# Altium PCB PCB1.PcbDoc
Units mm, origin at the board's own origin, x right, y up, seen from the top; angles counter-clockwise.
Board outline 60.26 x 38.23 mm, 2 copper layers (Top Layer, Bottom Layer); 12 components, 6 nets, 31 pads, 10 vias.
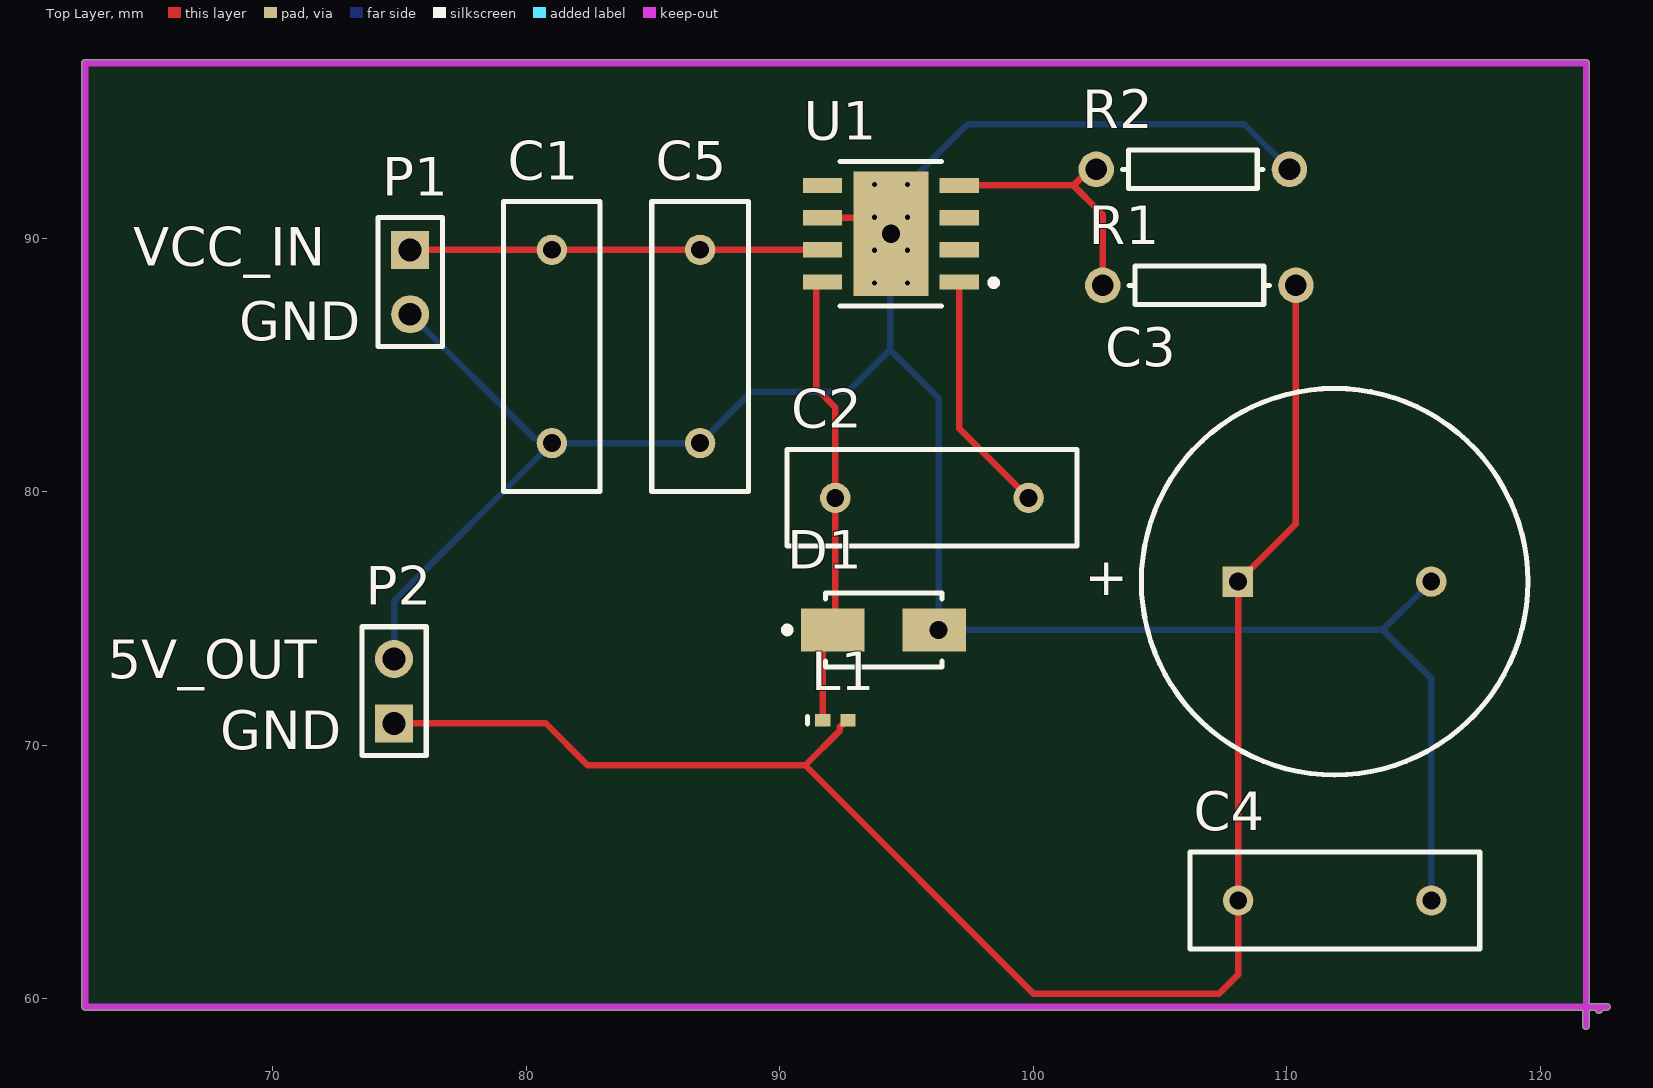
[diagram p0: Top Layer view]
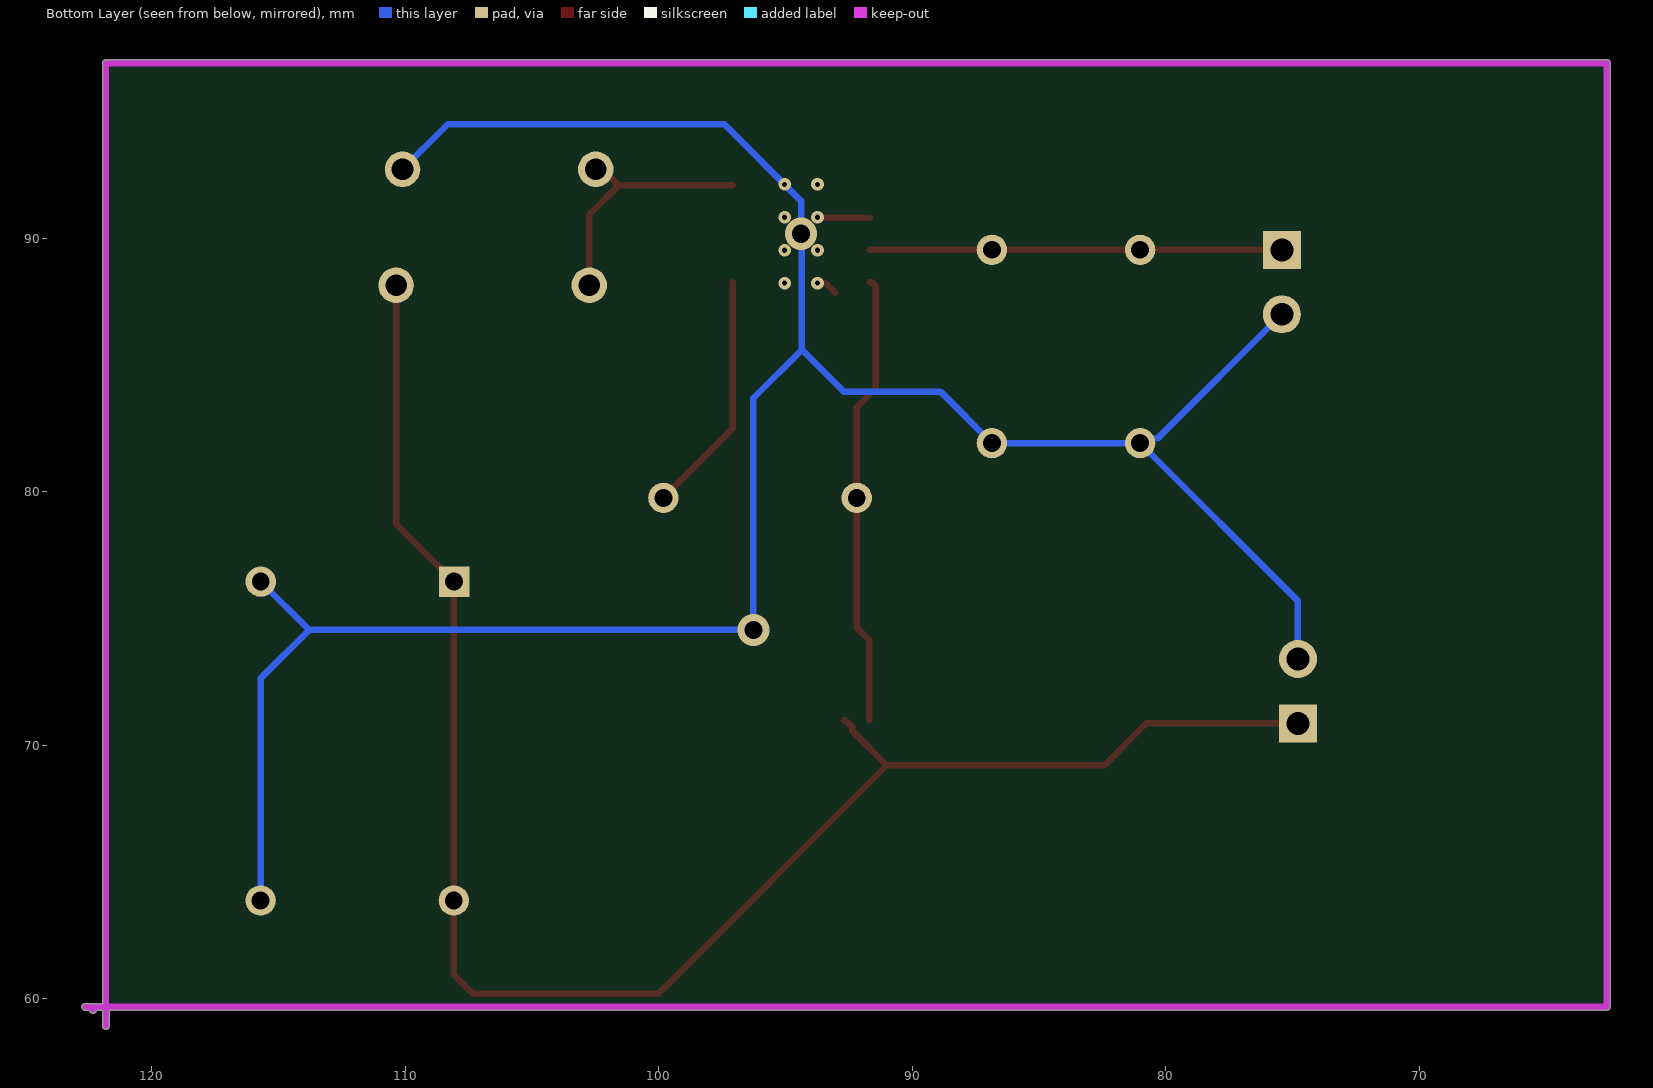
[diagram p1: Bottom Layer view, seen from below]

## Layer stack, top to bottom
Top Solder: solder mask 0.0102, Solder Resist, Dk 3.5
Top Layer: signal copper 0.0356
Dielectric 1: dielectric 0.32, FR-4, Dk 4.8
Bottom Layer: signal copper 0.0356
Bottom Solder: solder mask 0.0102, Solder Resist, Dk 3.5

## Board outline
121.666,58.928 121.666,59.563 62.611,59.563 cw(c62.611,59.69) 62.484,59.69 62.484,96.901 cw(c62.611,96.901) 62.611,97.028 121.793,97.028 cw(c121.793,96.901) 121.92,96.901 121.92,59.817 122.618,59.817 cw(c122.618,59.69) 122.746,59.69 cw(c122.618,59.69) 122.618,59.563 122.481,59.563 122.391,59.473 cw(c122.301,59.563) 122.174,59.563 121.92,59.563 121.92,58.928 cw(c121.793,58.928)

## Design rules (kind name [scope] priority, off if disabled: settings)
Clearance [All] p1: gap=0.254 ignorepadtopadclearanceinfootprint=FALSE except(0: Arc-Hole Track-Hole SMDPad-Hole THPad-Hole Via-Hole Fill-Hole Poly-Hole Region-Hole Text-Hole)
PolygonConnect [All] p1: connectstyle=Relief reliefconductorwidth=0.254 reliefentries=4 polygonreliefangle="90 Angle" airgapwidth=0.254
RoomDefinition Sheet1 [InComponentClass('Sheet1')] p1: confinementstyle=ConfineIn formatcopy=TRUE lockcomponents=FALSE outline 62.984,59.944 121.539,59.944 121.539,96.647 62.984,96.647
RoutingVias [All] p1: holewidth=0.711 width=1.27 viastyle="Through Hole" minholewidth=0.711 minwidth=1.27 maxholewidth=0.711 maxwidth=1.27
SolderMaskExpansion [All] p1: expansion=0.102 istentingtop=FALSE
Width [All] p1: maxlimit=0.254 minlimit=0.254 preferedwidth=0.254
30 further rules are at their usual default settings.

## Components (designator, comment, footprint, x,y, rotation, side; value= is the part's Value field where it differs from the comment)
C1 "Cap" RAD-0.3 81.018,85.725 r90 top value=4.7uF
C2 "Cap" RAD-0.3 96.004,79.756 r0 top value=10uF
C3 "Cap Pol1" RB7.6-15 111.879,76.454 r180 top value=100uF
C4 "Cap" RAD-0.3 111.887,63.881 r180 top value=100nF
C5 "Cap" RAD-0.3 86.86,85.725 r90 top value=4.7uF
D1 "B340A-13-F" FP-SMA-MFG 94.099,74.549 r0 top
L1 "Inductor" 0402-A 92.194,70.993 r0 top value=22uH
P1 "Header 2" HDR1X2 75.43,89.535 r270 top
P2 "Header 2" HDR1X2 74.795,70.866 r90 top
R1 "Res1" AXIAL-0.3 106.545,88.138 r0 top value=10K
R2 "Res1" AXIAL-0.3 106.291,92.71 r180 top value=3.3K
U1 "TPS5430DDA" FP-DDA0008J-MFG 94.386,90.17 r180 top

## Footprints (in the part's own frame and the unit in brackets; to place one, negate y for a bottom-side part, rotate by r counter-clockwise, add the part's x,y. Pads: shape width x height; smd on the part's side, far side on the other; paste and mask are expansions set on the pad)
0402-A [mm] "Chip Inductor, Body 1.0x0.5mm, IPC High Density"
  rect 0.6x0.5 smd: 1(-0.5,0) 2(0.5,0)
  silkscreen extent -1.1,-0.15 -1.1,0.15, body extent -0.55,-0.3 0.55,0.3, height 0.55
AXIAL-0.3 [mm] "Axial Device, Thru-Hole; 2 Leads; 0.3 in Pin Spacing"
  round 1.4 hole 0.85: 1(-3.81,0) 2(3.81,0)
  silkscreen extent -2.77,-0.76 2.77,0.76
FP-DDA0008J-MFG [mm]
  rect 1.55x0.6 smd paste+0 mask+0: 1(-2.7,1.905) 2(-2.7,0.635) 3(-2.7,-0.635) 4(-2.7,-1.905) 5(2.7,-1.905) 6(2.7,-0.635) 7(2.7,0.635) 8(2.7,1.905)
  rect 2.95x4.9 smd paste-1000 mask-1000: 9(0,0)
  silkscreen extent -4.18,-2.85 2,2.85, body extent -3.57,-2.75 3.57,2.75, height 0.25
FP-SMA-MFG [mm]
  rect 2.5x1.7 smd paste+0 mask+0: 1(-2,0) 2(2,0)
  silkscreen extent -3.92,-1.46 2.3,1.46, body extent -3.35,-1.56 3.35,1.56, height 0.25
HDR1X2 [mm] "Connector; Header; 2 Position"
  rect 1.5x1.5 hole 0.9: 1(0,0)
  round 1.5 hole 0.9: 2(2.54,0)
  silkscreen extent -1.27,-1.27 3.81,1.27
RAD-0.3 [mm] "Radial Cap, Thru-Hole; 2 Leads; 0.3 in Pin Spacing"
  round 1.2 hole 0.7: 1(-3.81,0) 2(3.81,0)
  silkscreen extent -5.71,-1.91 5.71,1.91
RB7.6-15 [mm] "Polarized Capacitor (Radial); 2 Leads"
  rect 1.2x1.2 hole 0.7: 1(3.81,0)
  round 1.2 hole 0.7: 2(-3.81,0)
  silkscreen extent -7.62,-7.62 7.62,7.62

## Part data
C1 C2 C4 C5: "Capacitor", LatestRevisionDate=17-Jul-2002, LatestRevisionNote="Re-released for DXP Platform.", PackageDescription="Radial Cap, Thru-Hole; 2 Leads; 0.3 in Pin Spacing", PackageReference=RAD-0.3, Published=8-Jun-2000, Publisher="Altium Limited"
C3: "Polarized Capacitor (Radial)", LatestRevisionDate=17-Jul-2002, LatestRevisionNote="Re-released for DXP Platform.", PackageDescription="Polarized Capacitor (Radial); 2 Leads", PackageReference=RB7.6-15, Published=8-Jun-2000, Publisher="Altium Limited"
D1: library part CMP-1667-00003-3, "DIODE SCHOTTKY 40V 3A SMA", Average Rectified Current=3A, Capacitance=250pF, Case/Package=SMA, Forward Voltage=500mV, Max Forward Surge Current (Ifsm)=80A, Max Operating Temperature=125°C, Max Repetitive Reverse Voltage (Vrrm)=40V, Max Reverse Current=500uA, Min Operating Temperature=-55°C, Package Quantity=5000, Contact Plating=Tin, Current=3A, Current Rating=3A, Element Configuration=Single, Forward Current=3A, Height=2.3mm, Lead Free="Lead Free", Length=4.6mm, Max Reverse Voltage (DC)=40V, Mount="Surface Mount", Number of Pins=2, Output Current=3A, Packaging="Tape and Reel", Peak Non-Repetitive Surge Current=80A, Polarity=Standard, Radiation Hardening=No, REACH SVHC="No SVHC", RoHS Compliant=Yes, Series=-, Termination=SMD/SMT, Voltage=40V, Voltage Rating (DC)=40V, Weight=0.002258oz, Width=2.92mm
P1 P2: "Header, 2-Pin", LatestRevisionDate=17-Jul-2002, LatestRevisionNote="Re-released for DXP Platform.", Publisher="Altium Limited"
R1 R2: "Resistor", LatestRevisionDate=17-Jul-2002, LatestRevisionNote="Re-released for DXP Platform.", PackageDescription="Axial Device, Thru-Hole; 2 Leads; 0.3 in Pin Spacing", PackageReference=AXIAL-0.3, Published=8-Jun-2000, Publisher="Altium Limited"
U1: library part CMP-2000-04960-2, "IC REG BUCK ADJUSTABLE 3A 8SOPWR", Manufacturer="Texas Instruments", Max Junction Temp=+125°C, Max Supply Voltage=36V, Min Supply Voltage=5.5V, Nominal Supply Current=3mA, Output Current=3A, Output Voltage=1.23-31V, Package=DDA0008J, Switching Frequency=500kHz, Temperature="-40°C to +125°C", Temperature Range Low=-40°C, Automotive=No, Category=IC, ComponentLink2Description=Datasheet, ComponentLink2URL=http://www.ti.com/lit/ds/symlink/tps5431.pdf, Device Class L1="Integrated Circuits (ICs)", Device Class L2="Power Management ICs", Device Class L3="Voltage Regulators - Switching", Digikey Description="IC REG BUCK ADJUSTABLE 3A 8SOPWR", Height=1.7mm, Lead Free=Yes, Manufacturer Part Number=TPS5430DDA, Max Duty Cycle=89%, Mouser Description="Voltage Regulators - Switching Regulators 5.5 to 36V Input 3A Step Dwn Converter", Number Of Outputs=1, Octopart=https://octopart.com/tps5430dda-texas+instruments-589977, Output Type=AdjustableProgrammable, RoHS=TRUE, Standoff Height=0mm, Switching Topology=Buck, Temperature Range High=+125°C
L1: Code_IEC=1005, Code_JEITA=0402, LatestRevisionDate=29-May-2009, LatestRevisionNote="IPC-7351 Footprint Added.", PackageDescription="Chip Inductor", PackageReference=0402-A, Published=8-Jun-2000, Publisher="Altium Limited"

## Via types
v1: diameter 0.5, hole 0.2, Top Layer to Bottom Layer, 8 vias
v2: diameter 1.27, hole 0.711, Top Layer to Bottom Layer, 2 vias

## Nets (pads, with @x,y where several pads share a name; then routed paths per layer and width w, separated by ;. In a path a pad name is that pad's centre, name@x,y a point inside that pad or via, vN(x,y) a via of type N, cw(c..) or ccw(c..) an arc to the next point about the centre after c; other vN are vias at no path point)
+5: C3.1 C4.2 L1.2 P2.1 R1.2 | length 68.9
  Top Layer w0.254: P2.1 80.772,70.866 82.423,69.215 91.005,69.215 ; L1.2 92.644,70.993 92.375,70.724 92.375,70.585 91.005,69.215 ; C4.2@108.45,63.881 C4.2@108.45,64.137 ; R1.2 110.355,78.74 C3.1 108.077,76.446 C4.2 108.077,60.96 107.315,60.198 105.492,60.198 100.022,60.198 91.005,69.215
GND: C1.1 C3.2 C4.1 C5.1 D1.2 P1.2 P2.2 R2.1 U1.6 U1.9 | length 103.9
  Top Layer w0.254: C1.1@80.837,82.096 C1.1 ; U1.6 93.721,90.805 v1(93.736,90.82) ; U1.9@93.038,87.847 93.411,88.22 v1(93.736,88.22)
  Bottom Layer w0.254: P2.2 74.795,75.692 C1.1 ; P1.2 80.329,82.096 80.837,82.096 C1.1 ; R2.1 108.323,94.488 97.409,94.488 94.386,91.465 v2(94.386,90.17) 94.353,90.137 94.353,85.598 ; C3.2 113.784,74.549 ; C4.1 115.697,72.636 113.784,74.549 ; C1.1 C5.1 88.892,83.947 92.702,83.947 94.353,85.598 ; 94.353,85.598 96.266,83.685 v2(96.266,74.549) 113.784,74.549
  other v1: 95.036,88.22 93.736,89.52 95.036,89.52 95.036,90.82 93.736,92.12 95.036,92.12
NetC2_1: C2.1 D1.1 L1.1 U1.8 | length 17.9
  Top Layer w0.254: U1.8 91.613,88.265 91.44,88.092 91.44,84.074 92.194,83.32 C2.1 92.194,74.644 D1.1 91.694,74.144 L1.1
NetC2_2: C2.2 U1.1 | length 9.6
  Top Layer w0.254: U1.1 97.086,82.484 C2.2
NetR1_1: R1.1 R2.2 U1.4 | length 10.1
  Top Layer w0.254: U1.4 101.587,92.075 ; R2.2 102.222,92.71 101.587,92.075 ; R1.1 102.735,90.94 102.616,91.059 102.603,91.059 101.587,92.075
VCC: C1.2 C5.2 P1.1 U1.7 | length 16.3
  Top Layer w0.254: P1.1 C1.2 C5.2 U1.7
pads on no net: U1.2 U1.3 U1.5

## Keep-outs
Keep-Out Layer:
  lines w0.254: 121.793,58.928 121.793,96.901 63.691,96.901 63.436,96.901 62.611,96.901 62.611,59.69 122.618,59.69 ; 122.301,59.563 122.428,59.69

## Silkscreen, mask and mechanical layers (free items; w line width, h text height)
Top Overlay:
  text "VCC_IN" at 64.508,88.9 h1.52
  text "GND" at 68.699,85.979 h1.52
  text "5V_OUT" at 63.5,72.644 h1.52
  text "GND" at 67.945,69.85 h1.52

## Text inside footprints (layer, text, board x,y; h text height)
C3: Top Overlay "+" at 103.747,77.191 h1.5 r180